# Altium PCB 协调器_wifi_oled.PcbDoc
Units mm, origin at the board's own origin, x right, y up, seen from the top; angles counter-clockwise.
Board outline 97 x 67 mm, 4 copper layers (Top Layer, Internal Plane 1, Internal Plane 2, Bottom Layer); 6 components, 19 nets, 68 pads, 0 vias.
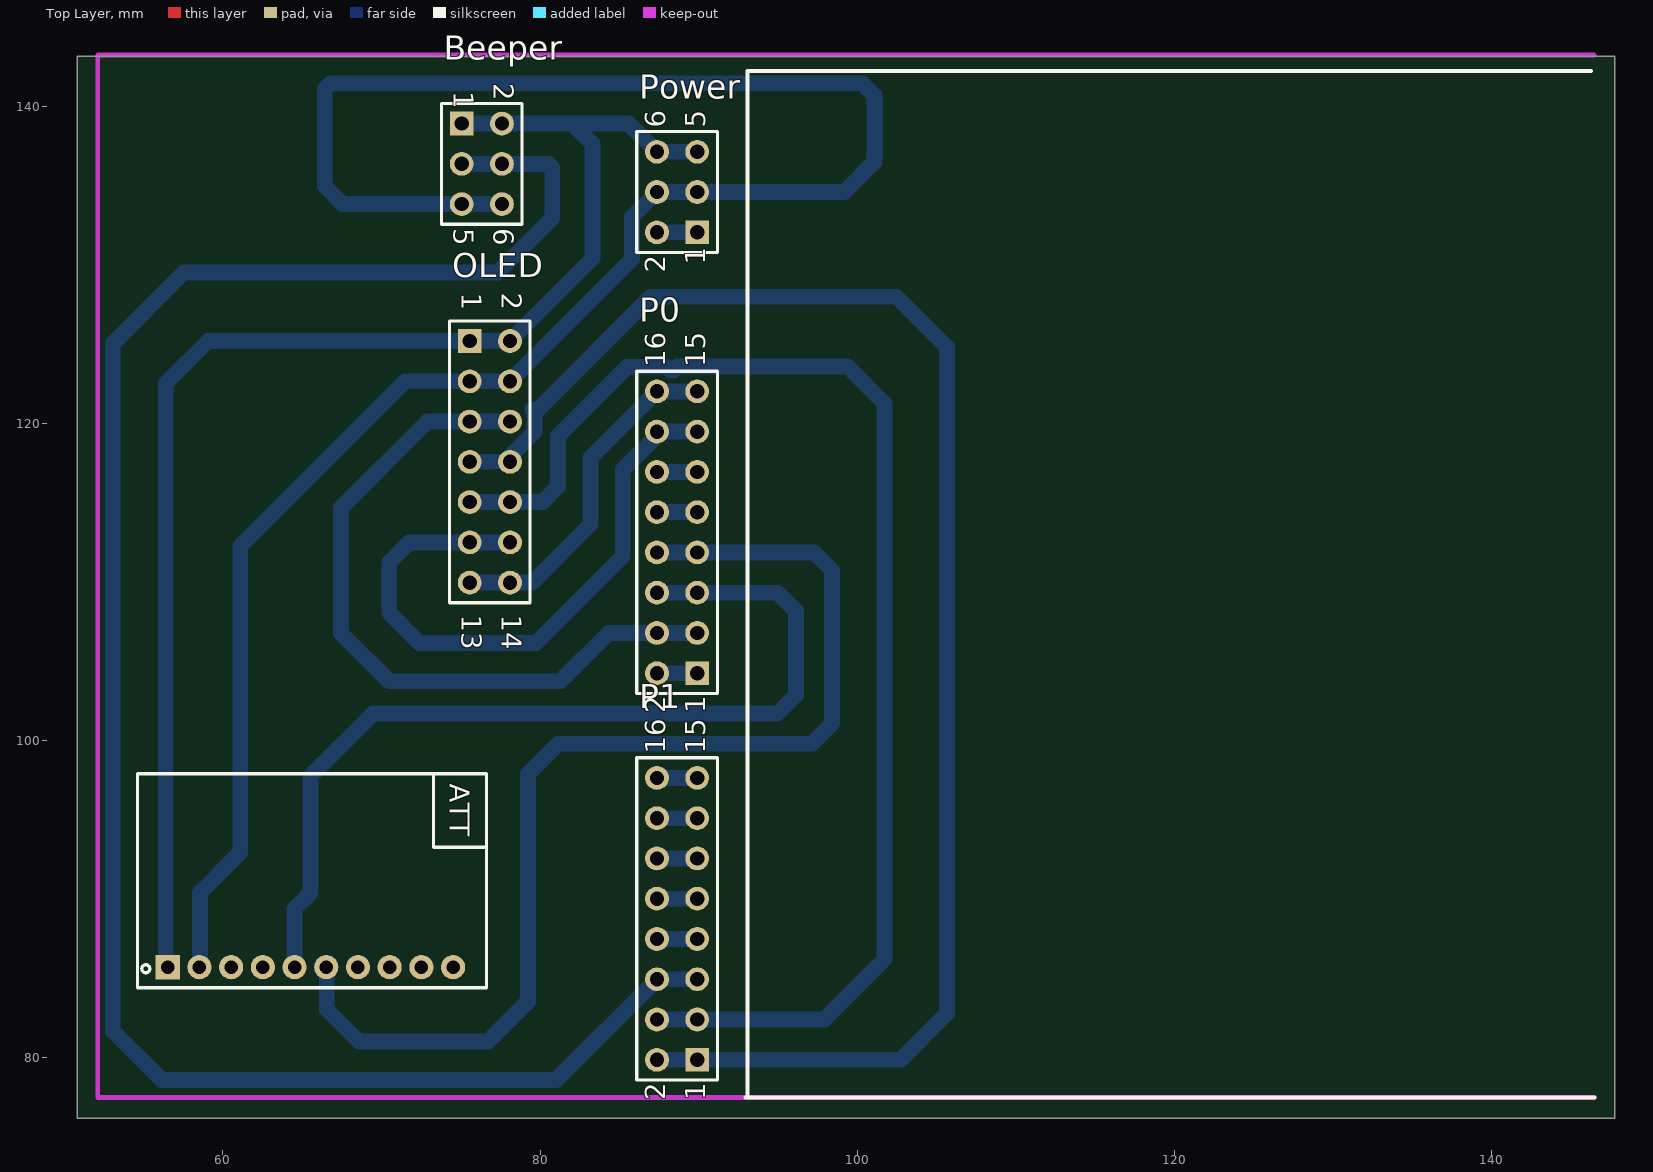
[diagram p0: Top Layer view]
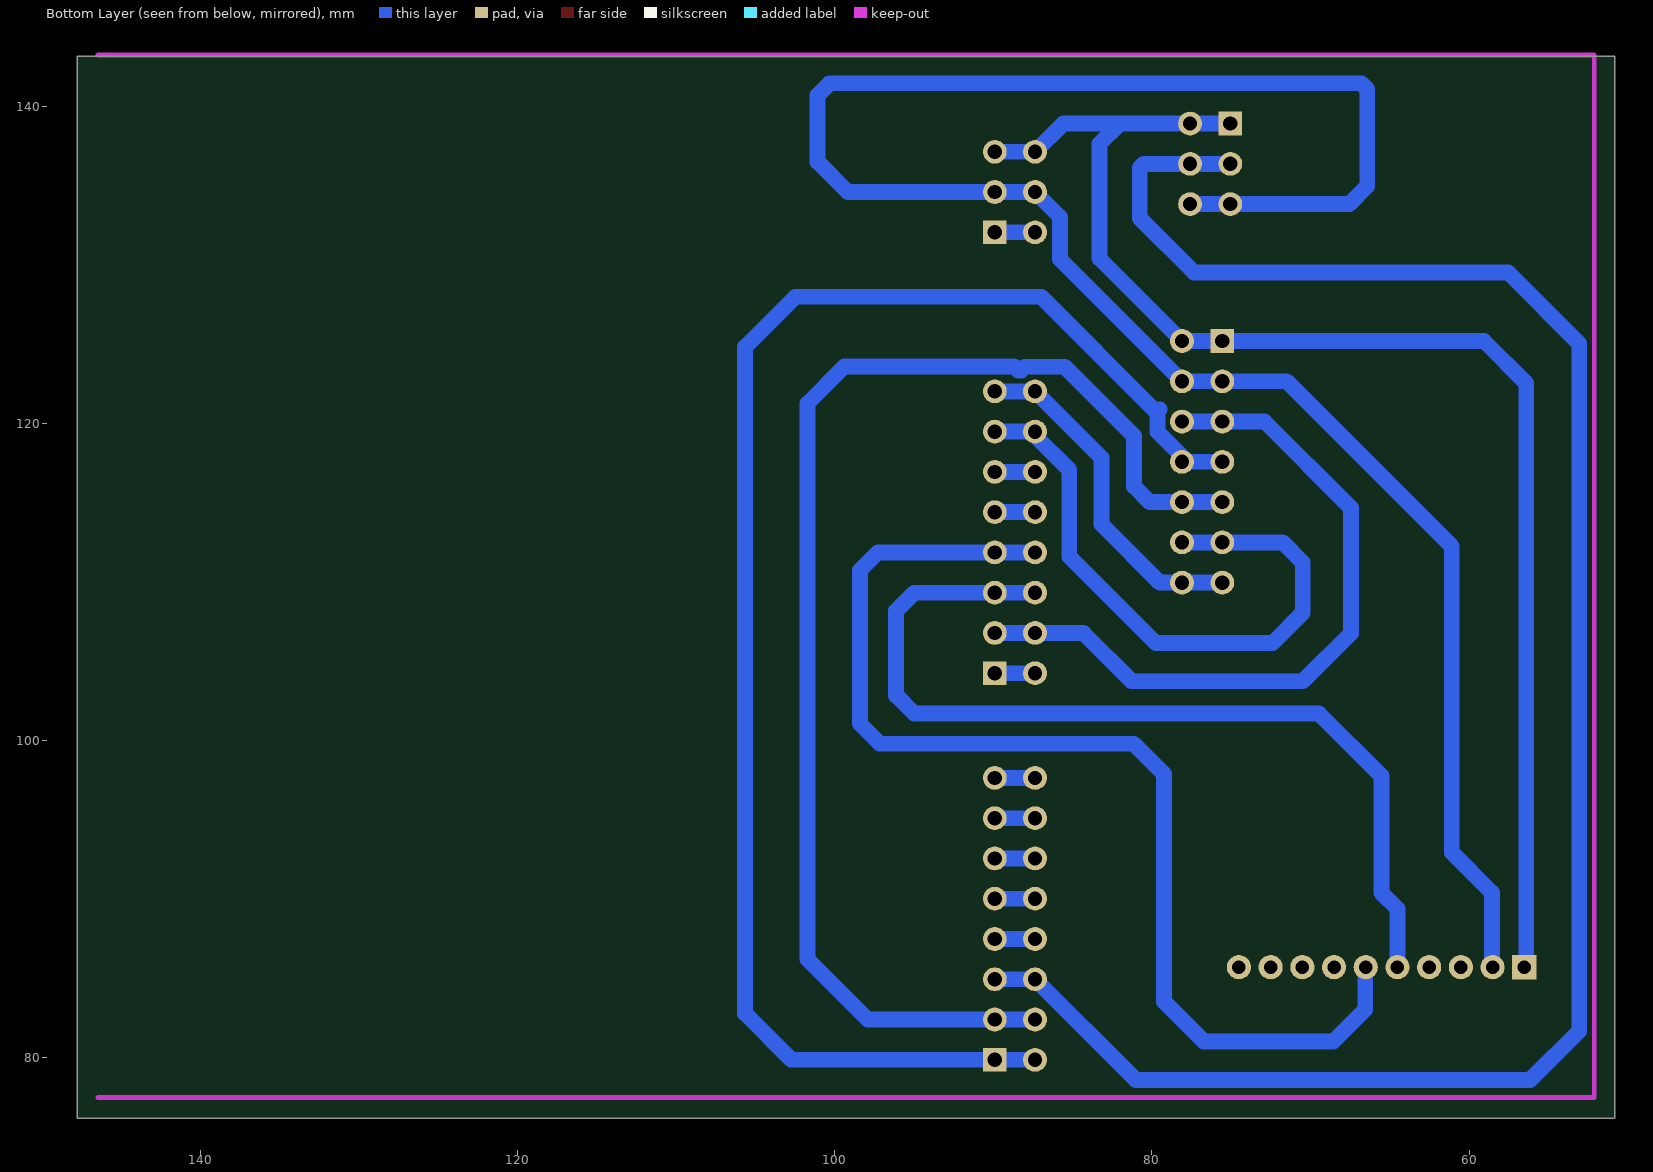
[diagram p1: Bottom Layer view, seen from below]
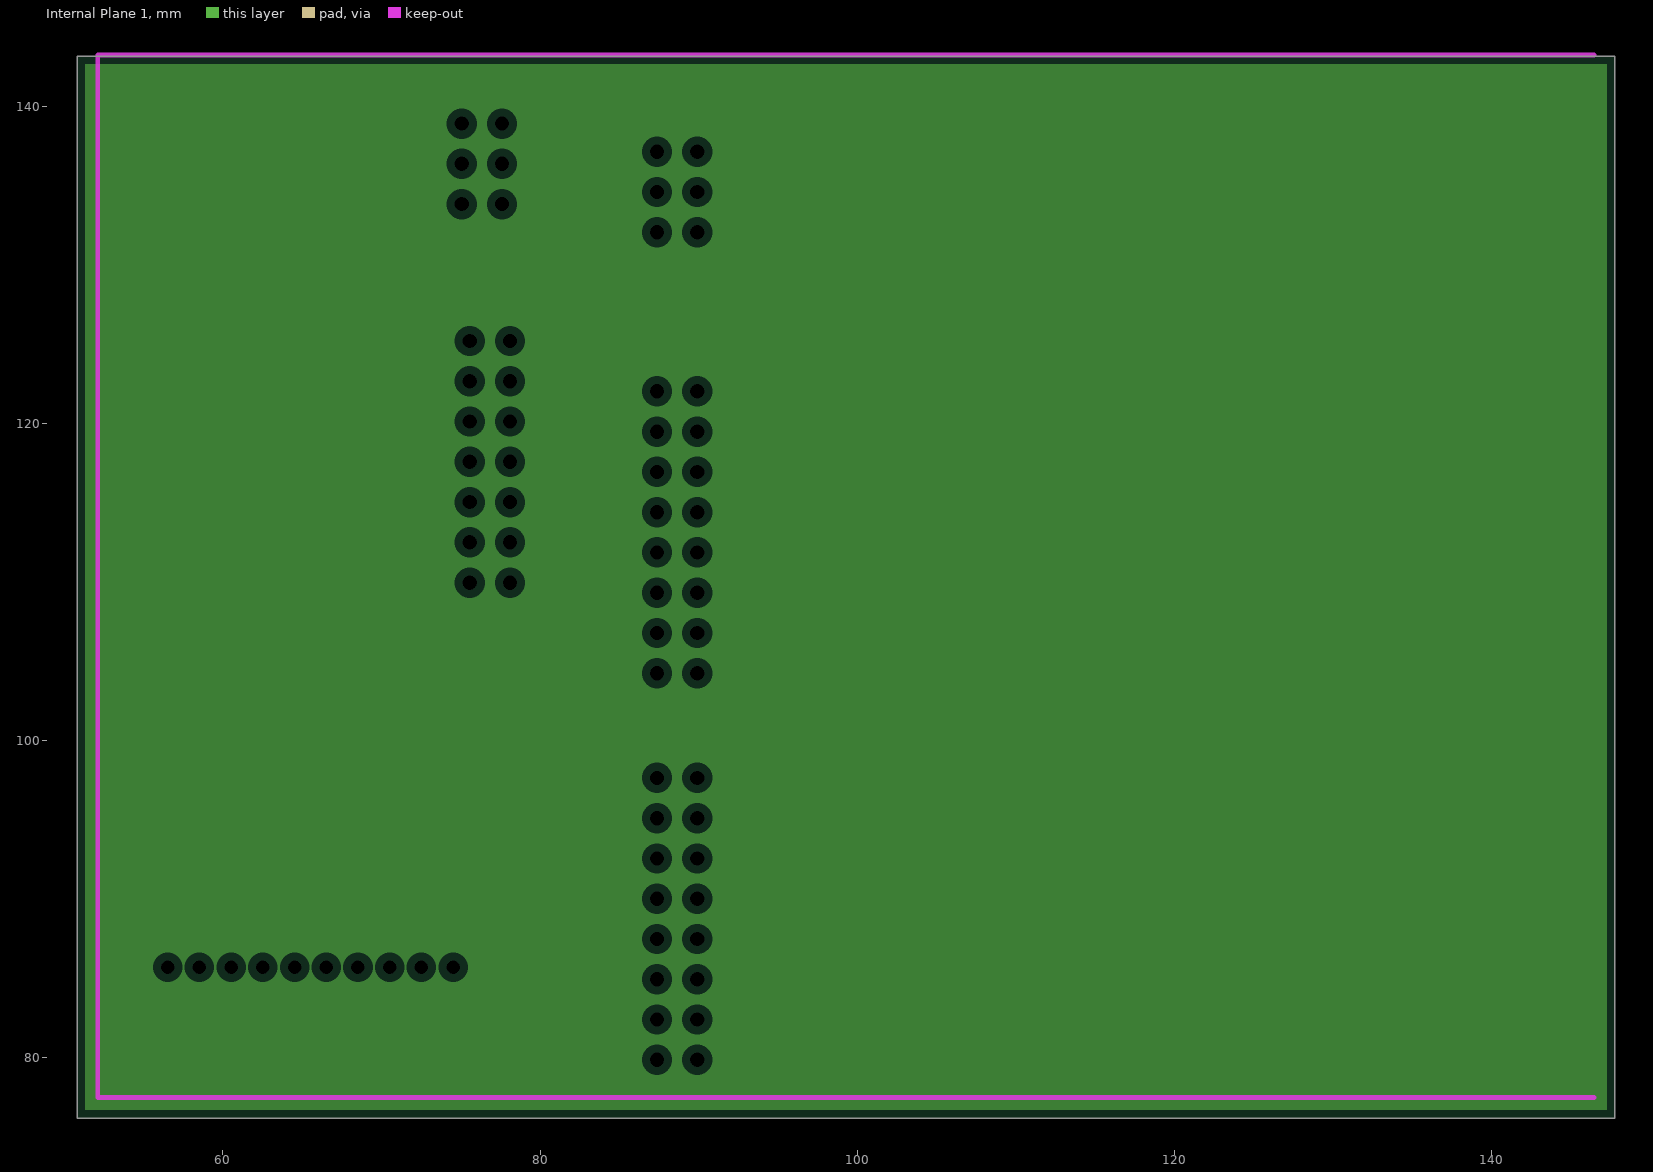
[diagram p2: Internal Plane 1, clearances drawn from the general rule]
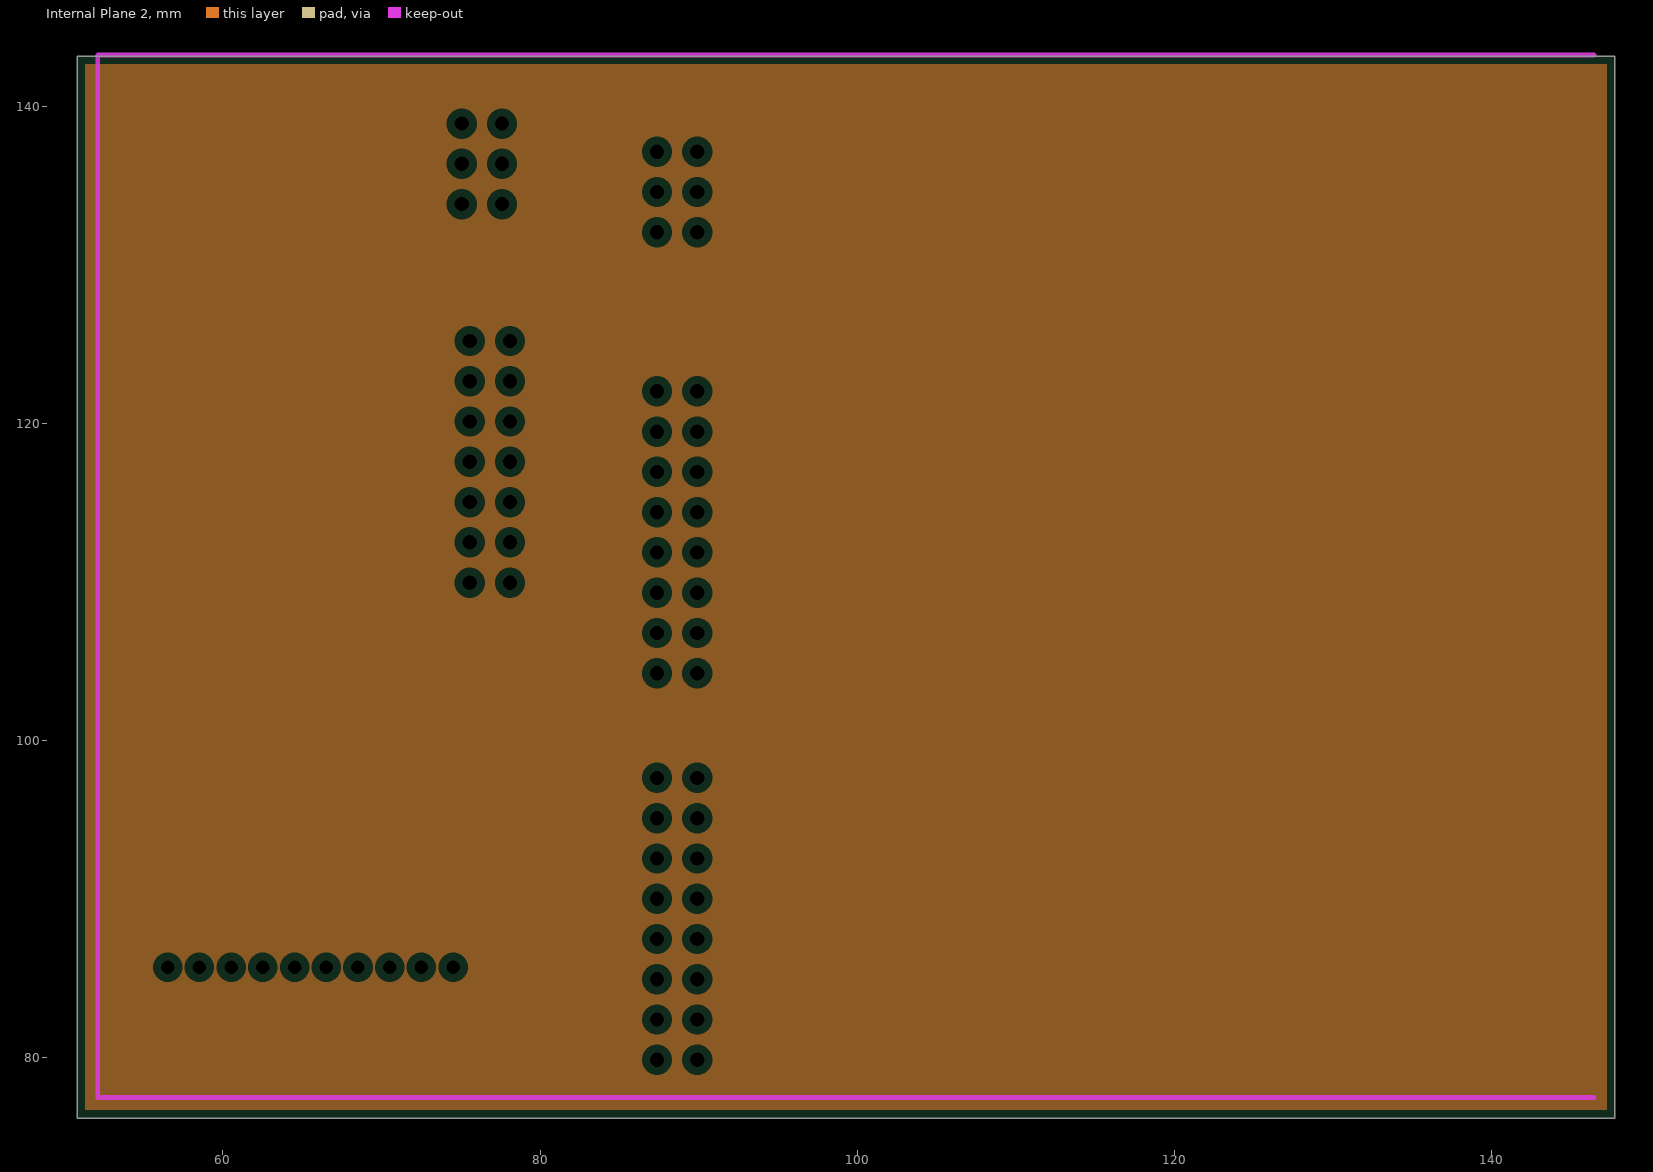
[diagram p3: Internal Plane 2, clearances drawn from the general rule]

## Layer stack, top to bottom
Top Layer: signal copper 0.0356
Dielectric: dielectric 0.32, FR-4, Dk 4.8
Internal Plane 1: plane copper 0.0356
Dielectric: dielectric 0.32, FR-4, Dk 4.8
Internal Plane 2: plane copper 0.0356
Dielectric: dielectric 0.32, FR-4, Dk 4.8
Bottom Layer: signal copper 0.0356

## Board outline
50.8,76.2 147.8,76.2 147.8,143.2 50.8,143.2

## Design rules (kind name [scope] priority, off if disabled: settings)
Clearance [All] p1: gap=0.3
PlaneClearance [All] p1: clearance=0.508
PlaneConnect [All] p1: planeconnectstyle=Relief reliefexpansion=0.508 reliefentries=4 reliefconductorwidth=0.254 reliefairgap=0.254
PolygonConnect [All] p1: connectstyle=Relief reliefconductorwidth=0.254 reliefentries=4 polygonreliefangle="90 Angle" airgapwidth=0.254
RoomDefinition 协调器_wifi_oled [InComponentClass('协调器_wifi_oled')] p1: confinementstyle=ConfineIn formatcopy=TRUE lockcomponents=FALSE outline 0,0 50.8,0 50.8,25.4 0,25.4
RoutingVias [All] p1: holewidth=0.8 width=1.6 viastyle="Through Hole" minholewidth=0.711 minwidth=1.27 maxholewidth=0.711 maxwidth=1.27
SolderMaskExpansion [All] p1: expansion=0.102
Width [All] p1: maxlimit=1 minlimit=1 preferedwidth=1
26 further rules are at their usual default settings.

## Classes and differential pairs
component class 协调器_wifi_oled: Beeper OLED P0 P1 Power

## Components (designator, comment, footprint, x,y, rotation, side; value= is the part's Value field where it differs from the comment)
Beeper "Header 3X2" HDR2X3 75.057,138.938 r270 top
OLED "Header 7X2" HDR2X7 75.565,125.222 r270 top
P0 "Header 8X2" HDR2X8 89.916,104.267 r90 top
P1 "Header 8X2" HDR2X8 89.916,79.883 r90 top
Power "Header 3X2" HDR2X3 89.916,132.08 r90 top
? "USR-WIF232-T" USR-WIFI232-T 56.515,85.725 r180 top

## Footprints (in the part's own frame and the unit in brackets; to place one, negate y for a bottom-side part, rotate by r counter-clockwise, add the part's x,y. Pads: shape width x height; smd on the part's side, far side on the other; paste and mask are expansions set on the pad)
HDR2X3 [mm] "Connector; Header; 3x2 Position"
  rect 1.5x1.5 hole 0.9: 1(0,0)
  round 1.5 hole 0.9: 2(0,2.54) 3(2.54,0) 4(2.54,2.54) 5(5.08,0) 6(5.08,2.54)
  silkscreen extent -1.27,-1.27 6.35,3.81
HDR2X7 [mm] "Connector; Header; 7x2 Position"
  rect 1.5x1.5 hole 0.9: 1(0,0)
  round 1.5 hole 0.9: 2(0,2.54) 3(2.54,0) 4(2.54,2.54) 5(5.08,0) 6(5.08,2.54) 7(7.62,0) 8(7.62,2.54) 9(10.16,0) 10(10.16,2.54) 11(12.7,0) 12(12.7,2.54) 13(15.24,0) 14(15.24,2.54)
  silkscreen extent -1.27,-1.27 16.51,3.81
HDR2X8 [mm] "Connector; Header; 8x2 Position"
  rect 1.5x1.5 hole 0.9: 1(0,0)
  round 1.5 hole 0.9: 2(0,2.54) 3(2.54,0) 4(2.54,2.54) 5(5.08,0) 6(5.08,2.54) 7(7.62,0) 8(7.62,2.54) 9(10.16,0) 10(10.16,2.54) 11(12.7,0) 12(12.7,2.54) 13(15.24,0) 14(15.24,2.54) 15(17.78,0) 16(17.78,2.54)
  silkscreen extent -1.27,-1.27 19.05,3.81
USR-WIFI232-T [mil]
  rect 60x60 hole 33.47: 1(0,0)
  round 60 hole 33.47: 2(-78.74,0) 3(-157.48,0) 4(-236.22,0) 5(-314.96,0) 6(-393.7,0) 7(-472.44,0) 8(-551.18,0) 9(-629.92,0) 10(-708.66,0)
  silkscreen extent -791,-480 75,51

## Part data
Beeper Power: "Header, 3-Pin, Dual row"
OLED: "Header, 7-Pin, Dual row"
P0 P1: "Header, 8-Pin, Dual row"

## Nets (pads, with @x,y where several pads share a name; then routed paths per layer and width w, separated by ;. In a path a pad name is that pad's centre, name@x,y a point inside that pad or via, vN(x,y) a via of type N, cw(c..) or ccw(c..) an arc to the next point about the centre after c; other vN are vias at no path point)
GND: ?.1 Beeper.1 Beeper.2 OLED.1 OLED.2 Power.5 Power.6 | length 96.1
  Bottom Layer w1: ?.1@56.388,85.725 56.388,122.555 59.055,125.222 OLED.1 OLED.2 83.312,130.429 83.312,137.668 82.042,138.938 Beeper.2 ; Beeper.1 Beeper.2 ; Power.5 Power.6 85.598,138.938 Beeper.2
P0_0: P0.1 P0.2 | length 2.5
  Bottom Layer w1: P0.2 P0.1
P0_1: OLED.5 OLED.6 P0.3 P0.4 | length 45.8
  Bottom Layer w1: OLED.6 OLED.5 72.898,120.142 67.437,114.681 67.437,106.807 70.485,103.759 81.28,103.759 84.328,106.807 P0.4 P0.3
P0_2: ?.5 P0.5 P0.6 | length 59.8
  Bottom Layer w1: ?.5 64.515,89.407 65.532,90.424 65.532,97.79 69.469,101.727 94.996,101.727 96.139,102.87 96.139,108.204 94.996,109.347 P0.5 P0.6
P0_3: ?.6 P0.7 P0.8 | length 73.3
  Bottom Layer w1: ?.6@66.548,85.725 66.548,83.058 68.58,81.026 76.708,81.026 79.248,83.566 79.248,97.917 81.153,99.822 97.155,99.822 98.425,101.092 98.425,110.744 97.282,111.887 P0.7 P0.8
P0_4: P0.9 P0.10 | length 2.5
  Bottom Layer w1: P0.10 P0.9
P0_5: P0.11 P0.12 | length 2.5
  Bottom Layer w1: P0.12 P0.11
P0_6: OLED.11 OLED.12 P0.13 P0.14 | length 40.4
  Bottom Layer w1: OLED.12 OLED.11 71.755,112.522 70.485,111.252 70.485,108.077 72.39,106.172 79.756,106.172 85.217,111.633 85.217,117.094 87.376,119.253 P0.14 P0.13
P0_7: OLED.13 OLED.14 P0.15 P0.16 | length 21.8
  Bottom Layer w1: OLED.13 OLED.14 79.502,109.982 83.185,113.665 83.185,117.856 P0.16 P0.15
P1_0: OLED.7 OLED.8 P1.1 P1.2 | length 98.5
  Bottom Layer w1: OLED.7 OLED.8 78.105,117.95 79.655,119.5 79.655,120.784 79.519,120.921 79.9,120.921 86.995,128.016 102.489,128.016 105.664,124.841 105.664,82.804 102.743,79.883 P1.1 P1.2
P1_1: OLED.9 OLED.10 P1.3 P1.4 | length 83.7
  Bottom Layer w1: OLED.9 OLED.10 80.137,115.062 81.123,116.048 81.123,119.223 85.497,123.597 88.018,123.597 88.268,123.347 88.422,123.347 88.697,123.622 99.39,123.622 101.727,121.285 101.727,86.233 97.917,82.423 P1.3 P1.4
P1_2: Beeper.3 Beeper.4 P1.5 P1.6 | length 124.1
  Bottom Layer w1: Beeper.3 Beeper.4 80.518,136.398 80.772,136.144 80.772,132.969 77.343,129.54 57.531,129.54 53.05,125.059 53.05,81.697 56.134,78.613 81.026,78.613 P1.6 P1.5
P1_3: P1.7 P1.8 | length 2.5
  Bottom Layer w1: P1.8 P1.7
P1_4: P1.9 P1.10 | length 2.5
  Bottom Layer w1: P1.10 P1.9
P1_5: P1.11 P1.12 | length 2.5
  Bottom Layer w1: P1.12 P1.11
P1_6: P1.13 P1.14 | length 2.5
  Bottom Layer w1: P1.14 P1.13
P1_7: P1.15 P1.16 | length 2.5
  Bottom Layer w1: P1.16 P1.15
VCC3.3: ?.2 Beeper.5 Beeper.6 OLED.3 OLED.4 Power.3 Power.4 | length 136.3
  Bottom Layer w1: ?.2@58.547,85.725 58.547,90.424 61.087,92.964 61.087,112.268 71.501,122.682 OLED.3 OLED.4 85.801,130.378 85.801,133.045 Power.4 Power.3 99.187,134.62 101.092,136.525 101.092,140.716 100.33,141.478 66.802,141.478 66.421,141.097 66.421,135.001 67.564,133.858 Beeper.5 Beeper.6
VCC5: Power.1 Power.2 | length 2.5
  Bottom Layer w1: Power.2 Power.1
pads on no net: ?.3 ?.4 ?.7 ?.8 ?.9 ?.10

## Polygon pours and split planes (outlines as drawn)
no net on Internal Plane 1 (split plane): 147.29,76.71 51.31,76.71 51.31,142.69 147.29,142.69
no net on Internal Plane 2 (split plane): 147.29,76.71 51.31,76.71 51.31,142.69 147.29,142.69

## Keep-outs
Keep-Out Layer:
  lines w0.3: 146.5,77.5 52.1,77.5 52.1,143.256 146.5,143.256

## Silkscreen, mask and mechanical layers (free items; w line width, h text height)
Top Overlay:
  lines w0.254: 92.964,77.5 146.5,77.5 ; 93.091,77.627 93.091,142.24 146.304,142.24

## Dimensions
52.1,77.5 to 52.1,143.256 on Mechanical 1
52.1,77.5 to 146.5,77.5 on Mechanical 1

## Text inside footprints (layer, text, board x,y; h text height)
Beeper: Top Overlay "6" at 77.089,132.334 h1.27 r270; Top Overlay "5" at 74.549,132.334 h1.27 r270; Top Overlay "2" at 77.089,141.478 h1.27 r270; Top Overlay "1" at 74.549,140.97 h1.27 r270
OLED: Top Overlay "2" at 77.597,128.27 h1.27 r270; Top Overlay "1" at 75.057,128.27 h1.27 r270; Top Overlay "14" at 77.597,107.95 h1.27 r270; Top Overlay "13" at 75.057,107.95 h1.27 r270
P0: Top Overlay "2" at 87.884,101.727 h1.27 r90; Top Overlay "1" at 90.424,101.727 h1.27 r90; Top Overlay "15" at 90.424,123.571 h1.27 r90; Top Overlay "16" at 87.884,123.571 h1.27 r90
P1: Top Overlay "2" at 87.884,77.343 h1.27 r90; Top Overlay "1" at 90.424,77.343 h1.27 r90; Top Overlay "15" at 90.424,99.187 h1.27 r90; Top Overlay "16" at 87.884,99.187 h1.27 r90
Power: Top Overlay "6" at 87.884,138.684 h1.27 r90; Top Overlay "5" at 90.424,138.684 h1.27 r90; Top Overlay "2" at 87.884,129.54 h1.27 r90; Top Overlay "1" at 90.424,130.048 h1.27 r90
?: Top Overlay "ATT" at 74.312,97.282 h1.27 r270